# Altium PCB arduino_nano.PcbDoc
Units mil, origin at the board's own origin, x right, y up, seen from the top; angles counter-clockwise.
Board outline 730 x 1700 mil, 2 copper layers (Top Layer, Bottom Layer); 28 components, 45 nets, 157 pads, 94 vias.
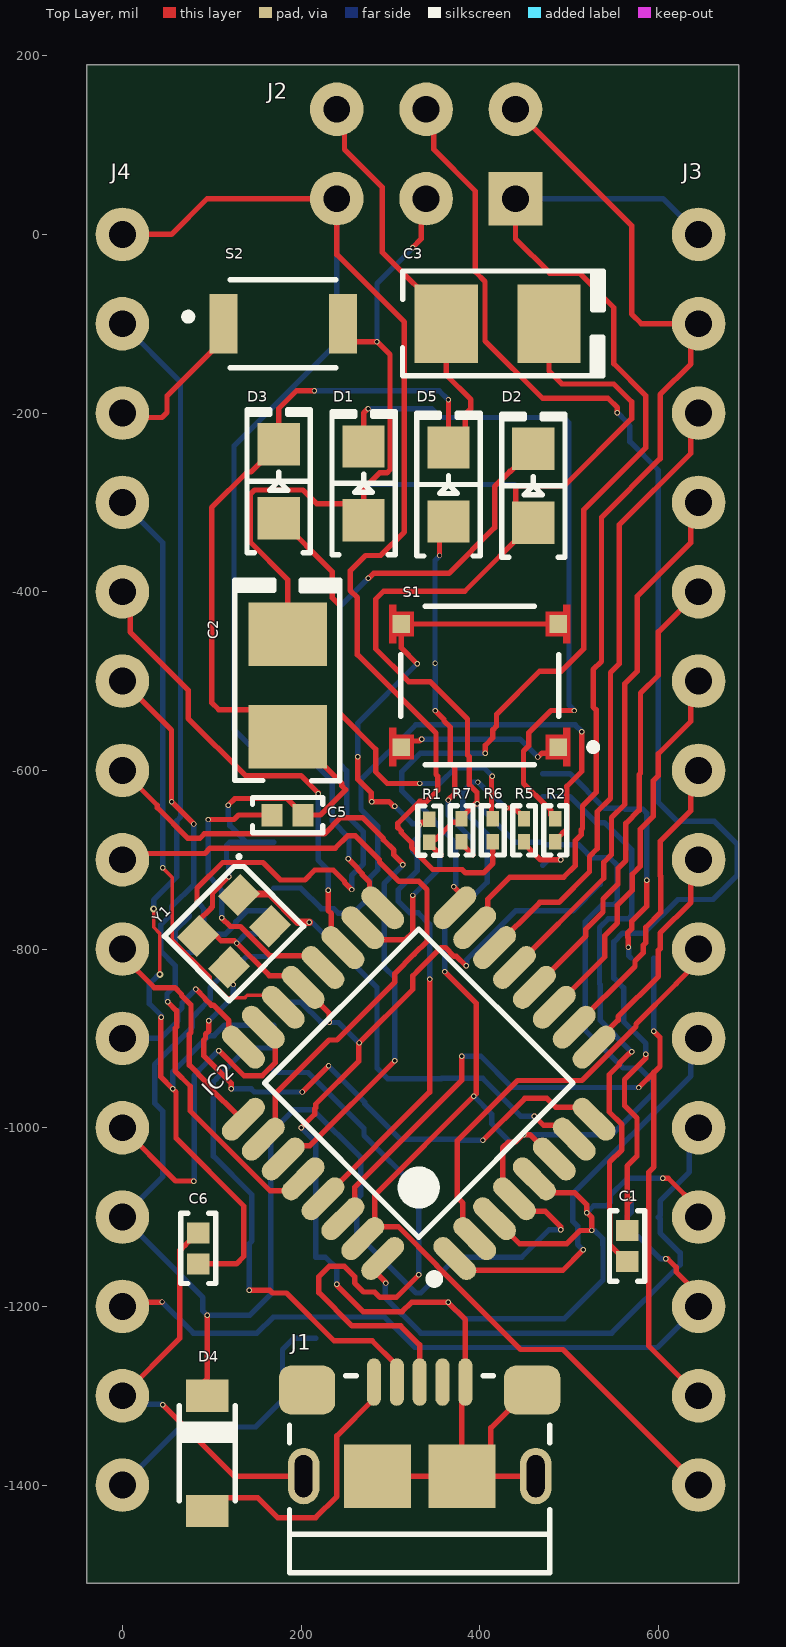
[diagram p0: Top Layer view]
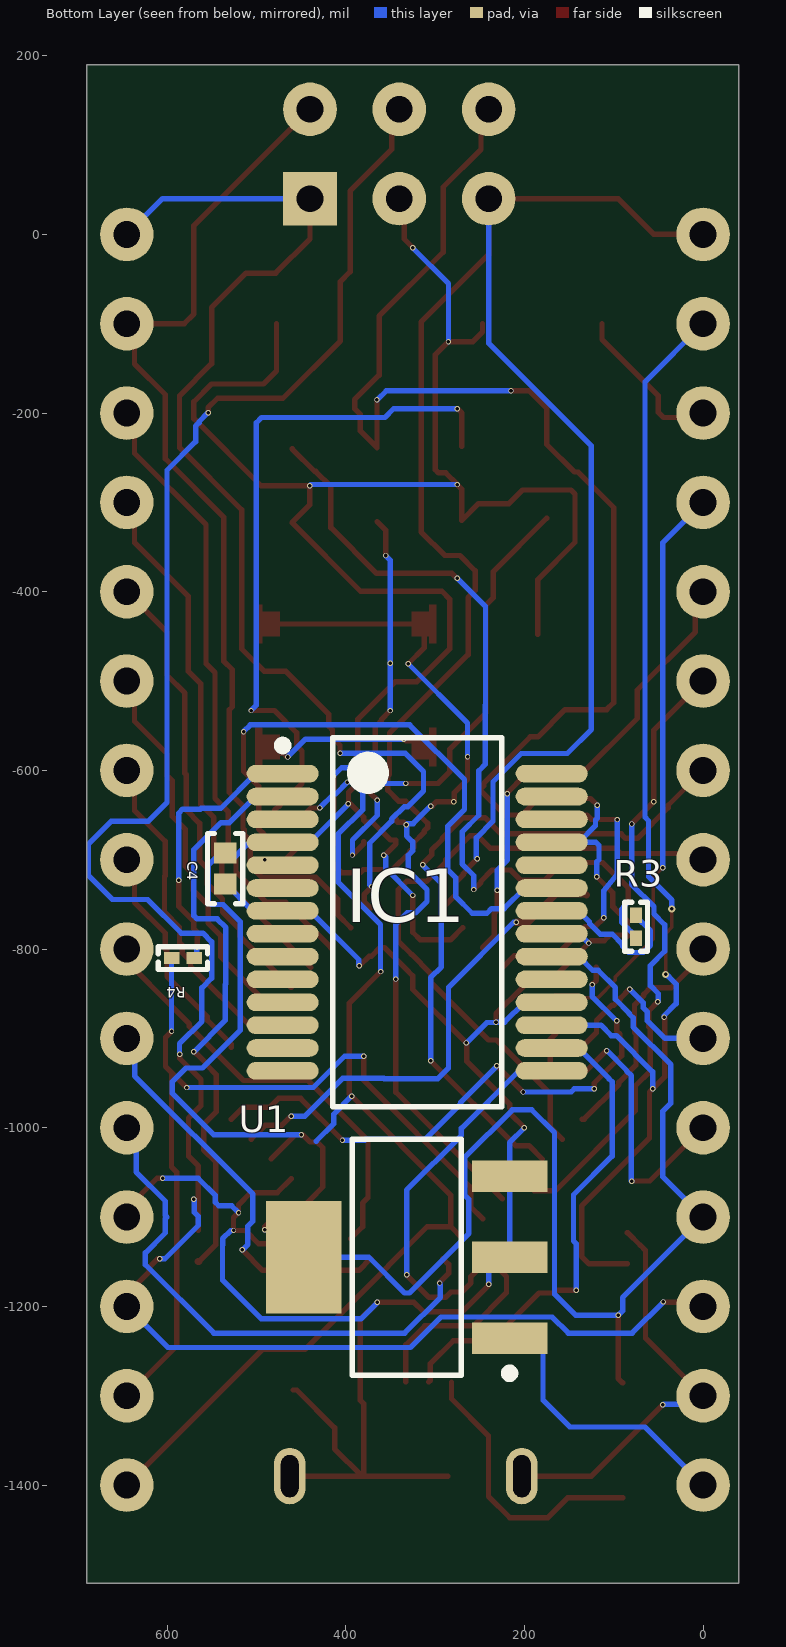
[diagram p1: Bottom Layer view, seen from below]
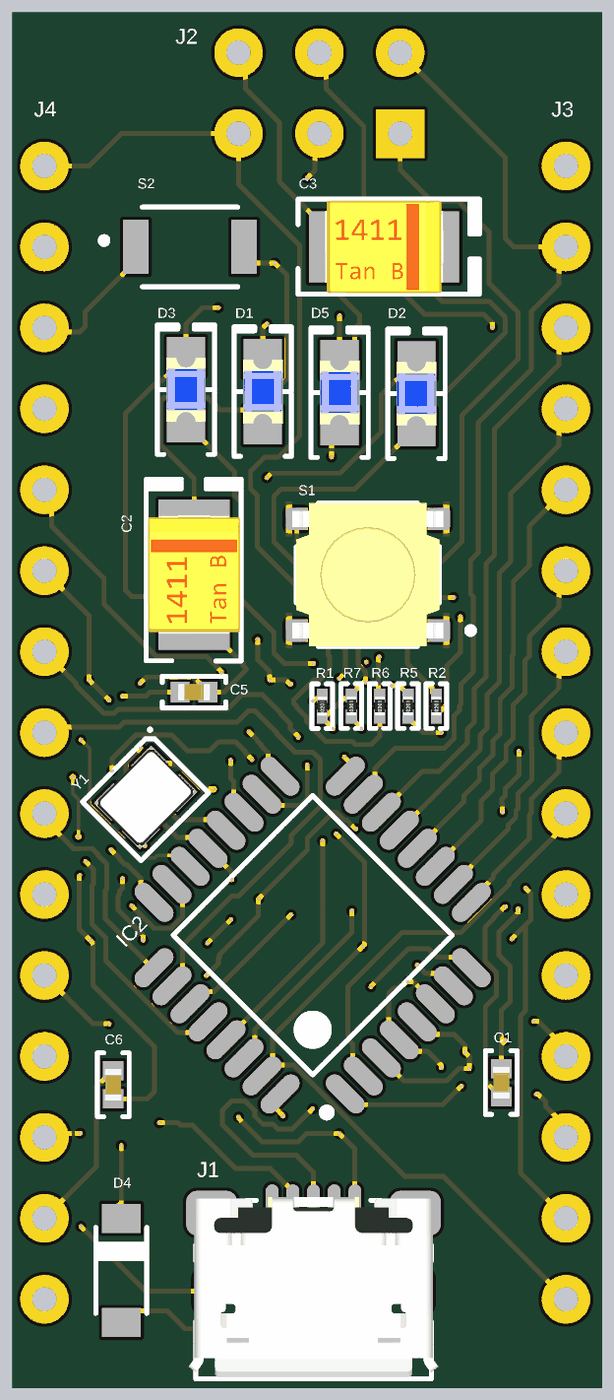
[diagram p2: 3D render of the assembled board from above, using the file's embedded part models]
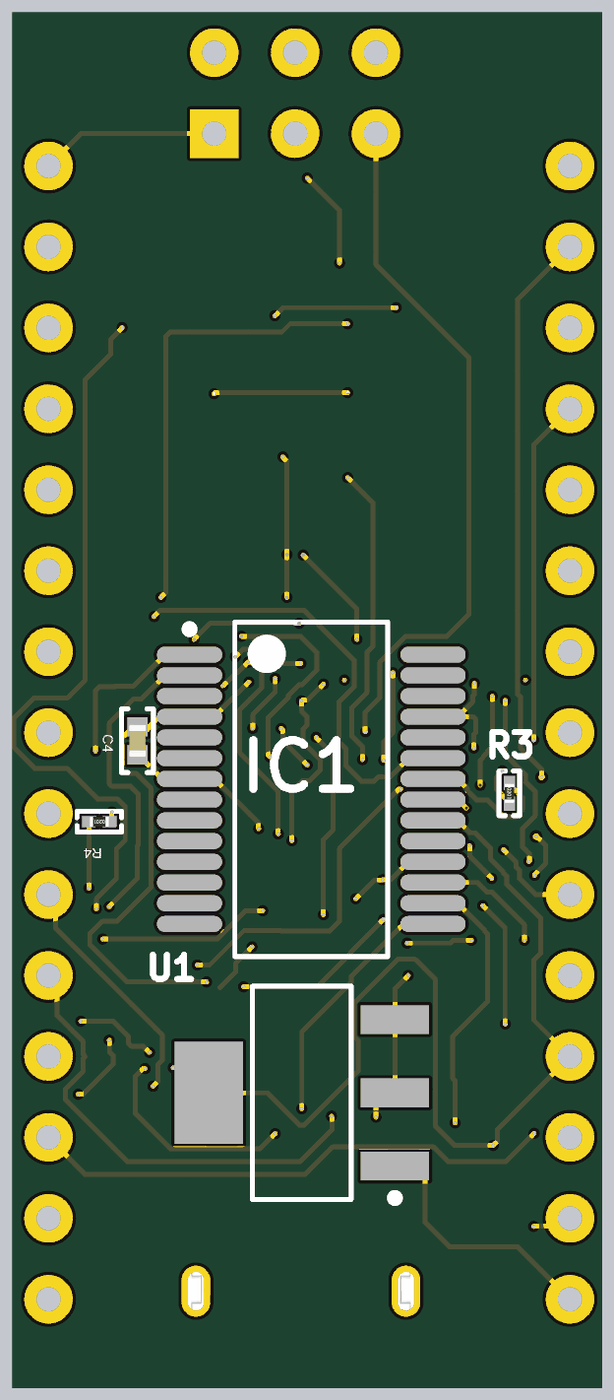
[diagram p3: 3D render of the assembled board from below, using the file's embedded part models]

## Layer stack, top to bottom
Top Solder: solder mask 0.4, Solder Resist, Dk 3.5
Top Layer: signal copper 1.4
Dielectric 1: dielectric 12.6, FR-4, Dk 4.8
Bottom Layer: signal copper 1.4
Bottom Solder: solder mask 0.4, Solder Resist, Dk 3.5

## Board outline
-40,-1510 -40,190 690,190 690,-1510

## Design rules (kind name [scope] priority, off if disabled: settings)
Clearance Clearance_1 [All] p1: gap=10 ignorepadtopadclearanceinfootprint=FALSE except(0: Arc-Hole Track-Hole SMDPad-Hole THPad-Hole Via-Hole Fill-Hole Poly-Hole Region-Hole Text-Hole; 3: Arc-SMDPad Arc-Via Track-SMDPad Track-Via SMDPad-SMDPad SMDPad-Via THPad-Via Via-Via)
Clearance [All] p2: gap=10 ignorepadtopadclearanceinfootprint=FALSE except(0: Arc-Hole Track-Hole SMDPad-Hole THPad-Hole Via-Hole Fill-Hole Poly-Hole Region-Hole Text-Hole)
DiffPairsRouting [InDifferentialPair('No Differential Pair')] p1: maxlimit=10 minlimit=0.5 mostfreqgap=0.5 toplayer_minwidth=6 toplayer_maxwidth=15 toplayer_prefwidth=6 bottomlayer_minwidth=6 bottomlayer_maxwidth=15 bottomlayer_prefwidth=6 maxuncoupledlength=500
FanoutControl Fanout_Small [(CompPinCount < 5)] p4 off: bgadir=Out bgaviamode=Centered fanoutstyle=Auto fanoutdirection=OutThenIn viagrid=1 // Fanout_Small (Default Rule)
PolygonConnect [All] p1: connectstyle=Relief reliefconductorwidth=10 reliefentries=4 polygonreliefangle="90 Angle" airgapwidth=10
RoutingVias [All] p1: holewidth=2 width=8 viastyle="Through Hole" minholewidth=3.94 minwidth=3.94 maxholewidth=7.87 maxwidth=8
SolderMaskExpansion [All] p1: expansion=4 istentingtop=FALSE
Width [All] p1: maxlimit=8 minlimit=4 preferedwidth=6 minimp=50.000000 maximp=50.000000 favimp=50.000000
28 further rules are at their usual default settings.

## Classes and differential pairs
component class arduino_nano: C1 C2 C3 C4 C5 C6 D1 D2 D3 D4 D5 IC1 IC2 J1 J2 J3 R1 R2 R3 R5 R6 R7 S1 S2 U1 Y1

## Components (designator, comment, footprint, x,y, rotation, side; value= is the part's Value field where it differs from the comment)
C1 "0.1 µF" "CAP 0402_1005" 565,-1132.32 r270 top
C2 "4.7 µF" "CAP POL 1411_3528" 185,-505 r270 top
C3 "4.7 µF" "CAP POL 1411_3528" 420,-100 r180 top
C4 "0.1µF" "CAP 0402_1005" 535,-710 r90 bottom
C5 "0.1 µF" "CAP 0402_1005" 185,-650 r0 top
C6 "0.1 µF" "CAP 0402_1005" 85,-1135 r90 top
D1 "Blue" "LED 0805_2012 BLUE" 270,-278.66 r90 top
D2 "Blue" "LED 0805_2012 BLUE" 460,-281.34 r90 top
D3 "Blue" "LED 0805_2012 BLUE" 175,-276.34 r90 top
D4 "MBR0520LT1G" SOD3716X135N 95,-1364.37 r270 top
D5 "Blue" "LED 0805_2012 BLUE" 365,-280 r90 top
IC1 "FT232RL" FT232RL 320,-770 r180 bottom
IC2 "Atmega168-20au" atmega168-20au 331.72,-950.09 r135 top
J1 "10118193-0001LF" "FCI USB 10118193-0001LF" 332.76,-1388.03 r180 top
J2 "HEAD 3X2" "Header 3x2" 440,40 r180 top
J3 "15PIN HEADER" "header 1x15" 660,-680 r0 top
J4 "15PIN HEADER" "header 1x15" 15,-680 r0 top
R1 "1 kOhms" "RES 0201_0603" 343.5,-667.4 r90 top
R2 "680 Ohms" "RES 0201_0603" 484.65,-667.17 r90 top
R3 "680 Ohms" "RES 0201_0603" 75,-775 r270 bottom
R4 "1 kOhms" "RES 0201_0603" 582.2,-810 r0 bottom
R5 "1 kOhms" "RES 0201_0603" 449.65,-667.17 r90 top
R6 "1 kOhms" "RES 0201_0603" 414.65,-667.17 r90 top
R7 "680 Ohms" "RES 0201_0603" 379.65,-667.17 r90 top
S1 "TL3315NF100Q" SW_TL3315NF100Q 400,-505 r180 top
S2 "B3U-1000P" SW_B3U-1000P 180,-100 r0 top
U1 "UA78M05" UA78M05 331.72,-1144.96 r0 bottom
Y1 "16MHz" "ABRACON ABM10" 125,-780 r225 top

## Footprints (in the part's own frame and the unit in brackets; to place one, negate y for a bottom-side part, rotate by r counter-clockwise, add the part's x,y. Pads: shape width x height; smd on the part's side, far side on the other; paste and mask are expansions set on the pad)
"ABRACON ABM10" [mm] "Crystal, 4-Leads, Body 2.00x2.45mm, Pitch 1.65mm, IPC Medium Density"
  rect 0.9x0.8 smd: 1(-0.825,-0.625) 2(0.825,-0.625) 3(0.825,0.625) 4(-0.825,0.625)
  silkscreen extent -1.65,-1.45 1.5,1.3, body extent -1.27,-1.02 1.28,1.03, height 0.5
atmega168-20au [mm] "TQFP, 32-Leads, Body 7.00x7.00mm, Pitch 0.80mm, IPC Medium Density"
  oval 1.5x0.55 smd: 1(-4.25,2.8) 2(-4.25,2) 3(-4.25,1.2) 4(-4.25,0.4) 5(-4.25,-0.4) 6(-4.25,-1.2) 7(-4.25,-2) 8(-4.25,-2.8) 17(4.25,-2.8) 18(4.25,-2) 19(4.25,-1.2) 20(4.25,-0.4) 21(4.25,0.4) 22(4.25,1.2) 23(4.25,2) 24(4.25,2.8)
  oval 0.55x1.5 smd: 9(-2.8,-4.25) 10(-2,-4.25) 11(-1.2,-4.25) 12(-0.4,-4.25) 13(0.4,-4.25) 14(1.2,-4.25) 15(2,-4.25) 16(2.8,-4.25) 25(2.8,4.25) 26(2,4.25) 27(1.2,4.25) 28(0.4,4.25) 29(-0.4,4.25) 30(-1.2,4.25) 31(-2,4.25) 32(-2.8,4.25)
  silkscreen extent -4.37,-3.1 3.1,3.75, body extent -3.5,-3.5 3.5,3.5, height 1.2
"CAP 0402_1005" [mm] "Chip Capacitor, 2-Leads, Body 1.02x0.51mm, IPC Medium Density"
  rect 0.6x0.64 smd: 1(-0.44,0) 2(0.44,0)
  silkscreen extent -1,-0.5 1,0.5, body extent -0.5,-0.26 0.5,0.26, height 0.52
"CAP POL 1411_3528" [mm] "Molded Capacitor, 2-Leads, Body 3.50x2.80mm, IPC Medium Density"
  rect 1.8x2.23 smd: 1(-1.46,0) 2(1.46,0)
  silkscreen extent -3,-1.5 2.71,1.48, body extent -1.87,-1.45 1.86,1.45, height 2
"FCI USB 10118193-0001LF" [mm] "USB 2.0 Type B Micro"
  oval 0.4x1.35 smd: 1(1.3,-2.625) 2(0.65,-2.625) 3(0,-2.625) 4(-0.65,-2.625) 5(-1.3,-2.625)
  oval 0.9x1.6 hole 0.5 slot 1.2 at 90 deg: S(-3.3,0.05) S(3.3,0.05)
  rrect50% 1.6x1.4 smd: S(-3.2,-2.4) S(3.2,-2.4)
  rect 1.9x1.8 smd: S(-1.2,0.05) S(1.2,0.05)
  silkscreen extent -3.7,-2.8 3.7,2.8, body extent -3.93,-2.9 3.93,2.76, height 2.78
FT232RL [mm] "SOP, 28-Leads, Body 10.35x5.15mm, Pitch 0.65mm, IPC Medium Density"
  oval 2.05x0.5 smd: 1(-3.825,4.225) 2(-3.825,3.575) 3(-3.825,2.925) 4(-3.825,2.275) 5(-3.825,1.625) 6(-3.825,0.975) 7(-3.825,0.325) 8(-3.825,-0.325) 9(-3.825,-0.975) 10(-3.825,-1.625) 11(-3.825,-2.275) 12(-3.825,-2.925) 13(-3.825,-3.575) 14(-3.825,-4.225) 15(3.825,-4.225) 16(3.825,-3.575) 17(3.825,-2.925) 18(3.825,-2.275) 19(3.825,-1.625) 20(3.825,-0.975) 21(3.825,-0.325) 22(3.825,0.325) 23(3.825,0.975) 24(3.825,1.625) 25(3.825,2.275) 26(3.825,2.925) 27(3.825,3.575) 28(3.825,4.225)
  silkscreen extent -3.95,-5.25 2.4,5.25, body extent -2.65,-5.25 2.65,5.25, height 2
"header 1x15" [mil] "2.54mm"
  round 60 hole 30: 1(-15,-720) 2(-15,-620) 3(-15,-520) 4(-15,-420) 5(-15,-320) 6(-15,-220) 7(-15,-120) 8(-15,-20) 9(-15,80) 10(-15,180) 11(-15,280) 12(-15,380) 13(-15,480) 14(-15,580) 15(-15,680)
"Header 3x2" [mil] "2.54mm"
  rect 60x60 hole 30: 1(0,0)
  round 60 hole 30: 2(100,0) 3(200,0) 4(0,-100) 5(100,-100) 6(200,-100)
"LED 0805_2012 BLUE" [mm] "Chip Diode, 2-Leads, Body 2.00x1.25mm, IPC Medium Density"
  rect 1.2x1.2 smd: 1(-1.05,0) 2(1.05,0)
  silkscreen extent -2.03,-0.9 2.03,0.9, body extent -1,-0.62 1,0.63, height 0.9
"RES 0201_0603" [mm] "Chip Resistor, 2-Leads, Body 0.60x0.30mm, IPC Medium Density"
  rect 0.44x0.35 smd: 1(-0.325,0) 2(0.325,0)
  silkscreen extent -0.7,-0.33 0.7,0.33, body extent -0.3,-0.15 0.3,0.15, height 0.21
SOD3716X135N [mm]
  rect 0.91x1.22 smd: A(1.635,0) C(-1.635,0)
  silkscreen extent -1.35,-0.8 1.35,0.8
SW_B3U-1000P [mm]
  rect 0.8x1.7 smd: 1(-1.7,0) 2(1.7,0)
  silkscreen extent -2.8,-1.25 1.5,1.25
SW_TL3315NF100Q [mm]
  rect 0.5x0.5 smd paste+0.1 mask+0.2: 1(-2.23,1.75) 2(2.23,1.75) 3(-2.23,-1.75) 4(2.23,-1.75)
  Top Layer region: -2.375,2.1 -1.875,2.1 -1.875,1.4 -2.375,1.4 -2.375,1.2 -2.575,1.2 -2.575,2.3 -2.375,2.3
  Top Layer region: 2.575,1.2 2.375,1.2 2.375,1.4 1.875,1.4 1.875,2.1 2.375,2.1 2.375,2.3 2.575,2.3
  Top Layer region: 2.575,-2.3 2.375,-2.3 2.375,-2.1 1.875,-2.1 1.875,-1.4 2.375,-1.4 2.375,-1.2 2.575,-1.2
  Top Layer region: -2.375,-1.4 -1.875,-1.4 -1.875,-2.1 -2.375,-2.1 -2.375,-2.3 -2.575,-2.3 -2.575,-1.2 -2.375,-1.2
  silkscreen extent -3.33,-2.25 2.25,2.25, body extent -2.37,-2.25 2.37,2.25, height 0.6
UA78M05 [mm] "SOT223, 4-Leads, Body 6.50x7.00mm (avg), Pitch 2.30mm, IPC Medium Density"
  rect 2.15x0.9 smd: 1(-2.925,2.3) 2(-2.925,0) 3(-2.925,-2.3)
  rect 2.15x3.2 smd: 4(2.925,0)
  silkscreen extent -3.05,-3.35 1.55,3.42, body extent -1.85,-3.35 1.85,3.35, height 1.7

## Part data
C1 C6: library part GCQ1555C1HR62CB01D, "CAP CER 0.62PF 50V C0G/NP0 0402", Capacitance="0.62 pF", Device Package="0402 (1005 Metric)", manufacturer="Murata Electronics", Operating Temperature="-55°C ~ 125°C", Ratings=AEC-Q200, Supplier Part Number 1=490-17557-1-ND, Temperature Coefficient="C0G, NP0", Tolerance=±0.25pF, Voltage - Rated=50V, Applications="RF, Microwave, High Frequency, Automotive", componentlink1description=Datasheet, componentlink1url=https://search.murata.co.jp/Ceramy/image/img/A01X/G101/ENG/GCQ1555C1HR62CB01-01.pdf, componentlink2description="DigiKey Link", componentlink2url=https://www.digikey.com/en/products/detail/murata-electronics/GCQ1555C1HR62CB01D/7803284, lastupdated="9/19/2022 12:57:24 PM", Lifecycle Status=Active, Minimum Order=1, Mounting Type="Surface Mount, MLCC", Package / Case="0402 (1005 Metric)", packaging=TapeAndReel, Part Number=GCQ1555C1HR62CB01D, Part Status=Active, partid=41932, price=0.04, series=GCQ, Size / Dimension="0.039\" L x 0.020\" W (1.00mm x 0.50mm)", Supplier 1=DigiKey, Thickness (Max)="0.022\" (0.55mm)"
C2 C3: library part TR3B475K025C0700, "CAP TANT 4.7UF 10% 25V 1411", Device Package="1411 (3528 Metric)", ESR (Equivalent Series Resistance)=700mOhm, manufacturer="Vishay Sprague", Manufacturer Size Code=B, Operating Temperature="-55°C ~ 125°C", Supplier Part Number 1=718-1523-1-ND, Tolerance=±10%, Voltage - Rated="25 V", Capacitance="4.7 µF", componentlink1description=Datasheet, componentlink1url=http://www.vishay.com/docs/40080/tr3.pdf, componentlink2description="DigiKey Link", componentlink2url=https://www.digikey.com/en/products/detail/vishay-sprague/TR3B475K025C0700/1859840, Features="General Purpose", Height - Seated (Max)="0.083\" (2.11mm)", lastupdated="9/1/2022 1:05:26 PM", Lifecycle Status=Active, Minimum Order=1, Mounting Type="Surface Mount", Package / Case="1411 (3528 Metric)", packaging=TapeAndReel, Part Number=TR3B475K025C0700, Part Status=Active, partid=2, price=0.46, series="TANTAMOUNT®, TR3", Size / Dimension="0.138\" L x 0.110\" W (3.50mm x 2.80mm)", Supplier 1=DigiKey, Type=Molded
C4: library part 885012205051, "CAP CER 0.015UF 25V X7R 0402", Capacitance="0.015 µF", Device Package="0402 (1005 Metric)", manufacturer="Würth Elektronik", Operating Temperature="-55°C ~ 125°C", Supplier Part Number 1=732-7546-1-ND, Temperature Coefficient=X7R, Tolerance=±10%, Voltage - Rated=25V, Applications="General Purpose", componentlink1description=Datasheet, componentlink1url=https://katalog.we-online.de/pbs/datasheet/885012205051.pdf, componentlink2description="DigiKey Link", componentlink2url=https://www.digikey.com/en/products/detail/würth-elektronik/885012205051/5453401, lastupdated="9/19/2022 12:57:34 PM", Lifecycle Status=Active, Minimum Order=1, Mounting Type="Surface Mount, MLCC", Package / Case="0402 (1005 Metric)", packaging=TapeAndReel, Part Number=885012205051, Part Status=Active, partid=2017, price=0.02, series=WCAP-CSGP, Size / Dimension="0.039\" L x 0.020\" W (1.00mm x 0.50mm)", Supplier 1=DigiKey, Thickness (Max)="0.022\" (0.55mm)"
C5: library part C0402C151F5GAC7867, "CAP CER 150PF 50V NP0 0402", Capacitance="150 pF", Device Package="0402 (1005 Metric)", manufacturer=KEMET, Operating Temperature="-55°C ~ 125°C", Supplier Part Number 1=399-14269-1-ND, Temperature Coefficient="C0G, NP0", Tolerance=±1%, Voltage - Rated=50V, Applications="General Purpose", componentlink1description=Datasheet, componentlink1url=https://api.kemet.com/component-edge/download/datasheet/C0402C151F5GAC7867.pdf, componentlink2description="DigiKey Link", componentlink2url=https://www.digikey.com/en/products/detail/kemet/C0402C151F5GAC7867/2196312, Features="Low ESL", lastupdated="9/19/2022 12:57:36 PM", Lifecycle Status=Active, Minimum Order=1, Mounting Type="Surface Mount, MLCC", Package / Case="0402 (1005 Metric)", packaging=TapeAndReel, Part Number=C0402C151F5GAC7867, Part Status=Active, partid=1709, price=0.43, series="SMD Comm C0G", Size / Dimension="0.039\" L x 0.020\" W (1.00mm x 0.50mm)", Supplier 1=DigiKey, Thickness (Max)="0.022\" (0.55mm)"
D1 D2 D3 D5: library part 5975606507F, "LED BLUE 0805 SMD", Current - Test=5mA, Device Package="0805 (2012 Metric)", Lens Color=0.93mm, manufacturer=Dialight, Millicandela Rating=36mcd, Supplier Device Package=0805, Supplier Part Number 1=350-4390-1-ND, Voltage - Forward (Vf) (Typ)=2.9V, Color=Blue, componentlink1description=Datasheet, componentlink1url=http://www.dialightsignalsandcomponents.com/Assets/Drawings/2D_Drawings_DrawingDetailedSpec/NewDrawings/18370A.pdf, componentlink2description="DigiKey Link", componentlink2url=https://www.digikey.com/en/products/detail/dialight/5975606507F/9385445, Configuration=Standard, Height (Max)=0.93mm, lastupdated="9/1/2022 1:14:53 PM", Lens Size="1.40mm x 1.24mm", Lens Style="Rectangle with Flat Top", Lifecycle Status=Active, Minimum Order=1, Mounting Type="Surface Mount", Package / Case="0805 (2012 Metric)", packaging=TapeAndReel, Part Number=5975606507F, Part Status=Active, partid=753, price=0.14, series=597, Size / Dimension="2.00mm L x 1.25mm W", Supplier 1=DigiKey, Wavelength - Dominant=470nm
D4: "Rectifier, Schottky Power; Plastic Sod-123; 0.5 a @ +90c If; +125; 20v; 1000", Package=None, Availability=Unavailable, MP=MBR0520LT1G, price=None
J1: "CONN RCPT USB2.0 MICRO B SMD R/A", Current Rating (Amps)="1.8A per Contact", manufacturer="Amphenol ICC (FCI)", Operating Temperature="-30°C ~ 80°C", Supplier Part Number 1=609-4616-2-ND, Voltage - Rated=100VAC, componentlink1description=Datasheet, componentlink1url=https://cdn.amphenol-icc.com/media/wysiwyg/files/documentation/datasheet/inputoutput/io_usb_micro.pdf, componentlink2description="DigiKey Link", componentlink2url=//digikey.com/product-detail/en/amphenol-icc-fci/10118193-0001LF/609-4616-2-ND/2785388, Connector Type="USB - micro B", Features="Solder Retention", Gender=Receptacle, lastupdated="12/9/2019 8:51:28 PM", Lifecycle Status=0, Mating Cycles=10000, Minimum Order=1, Mounting Feature=Horizontal, Mounting Type="Surface Mount, Right Angle; Through Hole", Number of Contacts=5, Number of Ports=1, packaging=TapeAndReel, Part Number=10118193-0001LF, Part Status=Active, price=0.21, series=-, Shielding=Shielded, Specifications="USB 2.0", Supplier 1=DigiKey, Termination=Solder
R1 R2 R3 R4 R5 R6 R7: library part 7-2176074-4, "RES SMD 33.2KOHM 0.5% 1/32W 0201", Device Package="0201 (0603 Metric)", manufacturer="TE Connectivity Passive Product", Operating Temperature="-55°C ~ 155°C", Power (Watts)="0.03W, 1/32W", Resistance="33.2 kOhms", Supplier Device Package=0201, Supplier Part Number 1=A129571CT-ND, Temperature Coefficient=±50ppm/°C, Tolerance=±0.5%, componentlink1description=Datasheet, componentlink1url=https://www.te.com/commerce/DocumentDelivery/DDEController?Action=srchrtrv&DocNm=1773200&DocType=DS&DocLang=English, componentlink2description="DigiKey Link", componentlink2url=https://www.digikey.com/en/products/detail/te-connectivity-passive-product/7-2176074-4/4489517, Composition="Thin Film", Height - Seated (Max)="0.011\" (0.28mm)", lastupdated="9/19/2022 1:09:18 PM", Lifecycle Status=Active, Minimum Order=1, Number of Terminations=2, Package / Case="0201 (0603 Metric)", packaging=TapeAndReel, Part Number=7-2176074-4, Part Status=Active, partid=1, price=0.10, series="CPF, Neohm", Size / Dimension="0.023\" L x 0.011\" W (0.58mm x 0.29mm)", Supplier 1=DigiKey
S1: "Tactile Switch SPST-NO Top Actuated Surface Mount", Package=None, Availability="In Stock", Check_prices=https://www.snapeda.com/parts/TL3315NF100Q/E-Switch/view-part/289310/?ref=eda, MF=E-Switch, MP=TL3315NF100Q, price=None, Purchase-URL=https://pricing.snapeda.com/search/part/TL3315NF100Q/?ref=eda, SnapEDA_Link=https://www.snapeda.com/parts/TL3315NF100Q/E-Switch/view-part/289310/?ref=snap
S2: "Switch Tactile N.O. SPST Round Button Gull Wing 0.05A 12VDC 1.5N SMD Embossed T/R", Package=None, Availability=Unavailable, MP=B3U-1000P, price=None
Y1: library part ABM10-16.000MHZ-E20-T, "CRYSTAL 16.0000MHZ 10PF SMD", Device Package="4-SMD, No Lead", ESR (Equivalent Series Resistance)="150 Ohms", Frequency Stability=±20ppm, Load Capacitance=10pF, manufacturer="Abracon LLC", Operating Mode=Fundamental, Operating Temperature="-20°C ~ 70°C", Supplier Part Number 1=535-9810-1-ND, componentlink1description=Datasheet, componentlink1url=https://abracon.com/Resonators/ABM10.pdf, componentlink2description="DigiKey Link", componentlink2url=http://digikey.com/product-detail/en/abracon-llc/ABM10-16.000MHZ-E20-T/535-9810-1-ND/2001433, Frequency=16MHz, Frequency Tolerance=±20ppm, Height - Seated (Max)="0.028\" (0.70mm)", lastupdated="3/19/2020 10:27:46 PM", Lifecycle Status=Active, Minimum Order=1, Mounting Type="Surface Mount", Package / Case="4-SMD, No Lead", packaging=TapeAndReel, Part Number=ABM10-16.000MHZ-E20-T, Part Status=Active, partid=278, price=0.96, series=ABM10, Size / Dimension="0.098\" L x 0.079\" W (2.50mm x 2.00mm)", Supplier 1=DigiKey, Type="MHz Crystal"

## Via types
v1: diameter 6, hole 3.94, Top Layer to Bottom Layer, 92 vias
v2: diameter 8, hole 3.94, Top Layer to Bottom Layer, 2 vias

## Nets (pads, with @x,y where several pads share a name; then routed paths per layer and width w, separated by ;. In a path a pad name is that pad's centre, name@x,y a point inside that pad or via, vN(x,y) a via of type N, cw(c..) or ccw(c..) an arc to the next point about the centre after c; other vN are vias at no path point)
3V3: C6.1 IC1.17 J4.14 | length 1344.4
  Top Layer w4: v2(35,-755) 35,-775.6 41.97,-782.57 41.97,-798.43 ; v2(41.97,-828.33) 41.97,-801.57 ; 42,-801.54 42,-800 42,-798.46
  Top Layer w6: v1(43.67,-876.33) 43,-877 43,-943.16 v1(56.38,-956.54) 60,-960.16 60,-1011.72 135.86,-1087.57 135.86,-1144.14 127.68,-1152.32 C6.1
  Bottom Layer w6: J4.14 65,-165 65,-652.37 61,-656.37 61,-719 35,-745 v2(35,-755) ; v2(41.97,-828.33) 41.43,-828.33 39.14,-830.61 38.56,-830.61 30.09,-839.08 30.09,-861.1 43.67,-874.67 v1(43.67,-876.33) ; v1(56.38,-956.54) 56.38,-937.39 96.91,-896.86 102.75,-896.86 114.45,-885.16 IC1.17
+5: C2.1 C3.1 C4.2 D1.1 D2.1 D4.C IC1.4 IC1.20 IC2.4 IC2.6 IC2.18 J2.2 J4.4 R1.1 R7.2 S2.2 U1.4 | length 4351.4
  Top Layer w6: D4.C@90,-1285.63 95,-1280.63 v1(95,-1210) ; C2.1 185,-386.24 143.38,-344.61 143.38,-290.74 148.06,-286.06 201.94,-286.06 217.26,-301.38 251.38,-301.38 D1.1 270,-285.49 275,-280.49 v1(275,-280) 288.06,-266.94 296.11,-266.94 299.62,-263.43 299.62,-134.62 v1(285,-120) 257.68,-120 246.93,-109.25 S2.2 ; IC2.18 282.67,-789.68 316.49,-789.68 325,-781.17 v1(325,-740) ; v1(325,-15) 325,-14.51 334.51,-5 334.51,34.51 J2.2 ; v1(357.28,-694.96) 356.9,-694.58 356.11,-694.58 343.86,-682.32 343.86,-677.92 349.9,-677.92 369.78,-658.03 377.76,-658.03 379.65,-656.14 379.65,-652.6 394.76,-637.49 v1(397.13,-637.49) 396.88,-637.24 396.88,-624.58 388.09,-615.8 388.09,-584.7 386.33,-582.94 386.33,-542.56 381.18,-537.41 381.18,-537.34 344.5,-500.65 320.31,-500.65 283.62,-463.97 283.62,-408.24 292.41,-399.45 383.23,-399.45 D2.1 440.32,-302.99 v1(440.32,-281.34) 494.89,-281.34 570,-206.23 570,-187.37 550.06,-167.43 492.01,-167.43 477.48,-152.9 C3.1 ; v1(449.53,-1008) 447.95,-1008 440.06,-1015.9 432.1,-1015.9 425.68,-1022.32 425.68,-1066.32 IC2.4 453.02,-1093.66 473.52,-1093.66 490.75,-1110.88 v1(490.75,-1114) ; v1@449.53,-1007.76 456.2,-1007.76 IC2.6
  Bottom Layer w6: IC1.20 138.9,-808.39 123.57,-823.72 117.51,-823.72 98.2,-843.02 98.2,-856.15 82.79,-871.56 82.79,-872.42 78.31,-876.9 78.31,-887.17 36.04,-929.45 36.04,-972.4 45,-981.36 45,-1055 J4.4 90,-1190 90,-1205 v1(95,-1210) 142.44,-1210 166.24,-1186.2 166.24,-1005.54 191.78,-980 213.51,-980 266.89,-1033.38 266.89,-1075.44 262.2,-1080.13 262.2,-1118.38 328.82,-1185 334,-1185 374.03,-1144.96 U1.4 477.85,-1114 v1(490.75,-1114) ; v1(275,-280) 438.98,-280 v1(440.32,-281.34) ; v1(285,-120) 285,-55 v1(325,-15) ; v1(325,-740) 355.09,-709.91 355.09,-697.15 v1(357.28,-694.96) ; v1(397.13,-637.49) 440.08,-680.43 IC1.4 473.21,-683.05 510.68,-683.05 521,-693.37 521,-694.16 524.51,-697.68 545,-697.68 554,-706.68 554,-746.62 550.49,-750.13 537.24,-750.13 518.12,-769.25 518.12,-890.93 560.35,-933.16 578.79,-933.16 594,-948.37 594,-961.63 547.63,-1008 v1(449.53,-1008)
A0: IC2.23 J4.5 | length 388.9
  Top Layer w6: J4.5 59.65,-1059.65 79.65,-1059.65 v1(80,-1060) ; v1(108.02,-913.7) 136.1,-941.78 156.48,-941.78 170.95,-927.3 170.95,-900.68 IC2.23
  Bottom Layer w6: v1(80,-1060) 80.35,-1059.65 80.35,-941.71 85.68,-936.37 85.68,-935.68 107.66,-913.7 v1(108.02,-913.7)
A1: IC2.24 J4.6 | length 202.6
  Top Layer w6: v1(82.2,-844.76) 92.53,-855.08 92.53,-855.65 99.63,-862.75 101.91,-862.75 119.24,-880.08 119.24,-893.51 IC2.24
  Bottom Layer w6: J4.6 42.63,-900 62.31,-880.31 62.31,-870.27 66.79,-865.79 66.79,-860.17 v1(82.2,-844.76)
A2: IC2.25 J4.7 | length 263.1
  Top Layer w6: J4.7 0,-807.57 35.76,-843.33 44,-843.33 44.16,-843.16 58.79,-843.16 66.2,-850.57 66.2,-851.95 76.78,-862.53 76.78,-893.45 75,-895.23 75,-929.9 94.31,-949.22 94.31,-951.58 133.19,-990.46 IC2.25
A3: IC2.26 J4.8 | length 738.9
  Top Layer w6: J4.8 7,-693 92.25,-693 98.23,-687.02 238.28,-687.02 252.34,-672.96 260.63,-672.96 287.86,-700.19 287.86,-702.33 309.67,-724.14 318.24,-724.14 318.37,-724 331.63,-724 341,-733.37 341,-791.31 326.63,-805.68 ; IC2.26 170.95,-999.51 170.95,-962.27 231.44,-901.78 240.06,-901.78 305,-836.84 305,-827.28 326.6,-805.68
A4: IC2.27 J4.9 | length 786.5
  Top Layer w6: J4.9 39,-639 39,-641.63 73.37,-676 86.63,-676 91.63,-671 226.02,-671 244.21,-652.81 268.76,-652.81 292.19,-676.24 292.19,-677.6 303.86,-689.27 303.86,-694.48 313.95,-704.58 v1(313.95,-705.79) ; IC2.27 195,-1020 210,-1020 v1(305,-925)
  Bottom Layer w6: v1(305,-925) 305,-831.87 293,-819.87 293,-726.75 v1(313.95,-705.79)
A5: IC2.28 J4.10 | length 721
  Top Layer w6: J4.10 55,-555 v1(55,-635) v1(80,-660) ; v1(50.79,-859.16) 60.78,-869.15 60.78,-886.82 59,-888.6 59,-936.53 76,-953.53 76,-981.24 165.25,-1070.5 189.05,-1070.5 IC2.28
  Bottom Layer w6: v1(50.79,-859.16) 50,-858.37 50,-850 59,-841 59,-818.46 43,-802.46 43,-772.77 54.97,-760.8 54.97,-752.51 80,-727.49 v1(80,-660)
A6: IC2.19 J4.11 | length 537
  Top Layer w6: J4.11 8.64,-408.64 8.64,-445 73.68,-510.04 73.68,-541.8 137.79,-605.91 199.97,-605.91 219.07,-625.02 v1(219.07,-626.03) ; v1(230.4,-734.17) 230.4,-756.73 233.84,-760.17 233.84,-785.4 IC2.19
  Bottom Layer w6: v1(219.07,-626.03) 219.07,-700.35 230.4,-711.68 v1(230.4,-734.17)
A7: IC2.22 J4.12 | length 672.5
  Top Layer w4: v1(45,-709) 55.97,-719.97 55.97,-789.03 98.16,-831.22 98.16,-834.96 117.92,-854.72 136.76,-854.72 139.78,-851.69 166.51,-851.69 IC2.22
  Bottom Layer w6: J4.12 45,-345 v1(45,-709)
AREF: J4.13 S2.1 | length 179.8
  Top Layer w6: J4.13 5,-205 44.14,-205 50,-199.14 50,-180.79 113.07,-117.72 S2.1
D0/RX: IC2.30 J3.2 R4.2 | length 994.8
  Top Layer w6: IC2.30 260.04,-1088.59 260.04,-1066.67 380,-946.71 v1(380,-920) ; v1(578,-955) 595,-938 ; v1(595,-892.12) 601.78,-898.9 601.78,-931.22 595,-938 ; J3.2 589.04,-1244.04 589.04,-1049.89 595,-1043.93 595,-938
  Bottom Layer w6: v1(380,-920) 401.34,-920 436.34,-955 v1(578,-955) ; v1(595,-892.12) R4.2
D1/TX: IC2.31 J3.1 R5.2 | length 1239
  Top Layer w6: IC2.31 IC2.31@282.31,-1110.86 ; v1(360.81,-825.13) 396,-860.32 396,-961.98 282.31,-1075.67 IC2.31@282.31,-1110.86 ; v1(429.13,-642.05) 439.09,-642.05 449.65,-652.6 R5.2 ; J3.1 493.16,-1248.16 445.61,-1248.16 352.09,-1154.64 352.09,-1154.02 308.93,-1110.86 IC2.31@282.31,-1110.86
  Bottom Layer w6: v1(360.81,-825.13) 361,-824.94 361,-772.48 408.44,-725.04 408.44,-671.43 381.13,-644.12 381.13,-624.27 392.39,-613 v1(398.03,-613) ; v1(393.32,-964.65) 413.31,-984.65 413.31,-995.39 432.96,-1015.04 ; v1(398.03,-613) 411.11,-626.11 413.19,-626.11 v1(429.13,-642.05)
D2: IC2.32 J3.5 | length 611.5
  Top Layer w6: IC2.32 284.84,-1152.88 284.84,-1163.1 295,-1173.26 v1(295,-1173.81)
  Bottom Layer w6: v1(295,-1173.81) 294.62,-1174.19 294.62,-1175.38 294.09,-1175.91 294.09,-1190 334.05,-1229.96 547.67,-1229.96 624.28,-1153.35 624.28,-1140.09 602,-1117.81 602,-1102 600,-1100 602,-1098 602,-1082.19 634.63,-1049.56 634.63,-1024.98 645,-1014.61 J3.5
D3: IC2.1 J3.6 | length 458.6
  Top Layer w6: IC2.1 385.31,-1159.58 492.95,-1159.58 v1(515.76,-1136.77)
  Bottom Layer w6: v1(515.76,-1136.77) 509.58,-1130.58 509.58,-1110.2 504,-1104.63 504,-1074.25 636.25,-942 636.25,-908.75 J3.6
D4: IC2.2 J3.7 | length 486.2
  Top Layer w6: IC2.2 381.14,-1110.86 381.14,-1084.42 375,-1078.29 375,-1014.35 442.26,-947.09 514.42,-947.09 575,-886.51 575,-883.84 620,-838.84 620,-838.53 645,-813.53 J3.7
D5: IC2.9 J3.8 | length 258.2
  Top Layer w6: IC2.9 527.99,-906.57 555,-879.56 555,-875.55 600,-830.55 600,-801.48 602,-799.48 602,-782.19 636.36,-747.83 636.36,-708.64 J3.8
D6: IC2.10 J3.9 | length 345.8
  Top Layer w6: IC2.10 573.76,-819.4 573.76,-813.5 583,-804.26 583,-795.85 586,-792.85 586,-775.56 602.83,-758.74 602.83,-718.64 602,-717.81 602,-679.36 636.36,-645 636.36,-608.64 J3.9
D7: IC2.11 J3.10 | length 432.1
  Top Layer w6: IC2.11 540,-808.62 540,-784.79 554,-770.79 554,-750.8 570.83,-733.97 570.83,-716.26 579.54,-707.55 579.54,-665.97 594.38,-651.13 594.38,-611.45 600,-605.82 600,-581.36 636.36,-545 636.36,-508.64 J3.10
D8: IC2.12 J3.11 | length 519.1
  Top Layer w6: IC2.12 518.87,-785.22 518.87,-777.64 538,-758.51 538,-744.17 554.83,-727.35 554.83,-709.63 563.54,-700.92 563.54,-659.35 578.38,-644.5 578.38,-604.82 580,-603.2 580,-513.48 600,-493.48 600,-445 J3.11
D9: IC2.13 J3.12 | length 606
  Top Layer w6: IC2.13 538.83,-720.72 538.83,-703 547.54,-694.29 547.54,-652.72 562.38,-637.88 562.38,-502.82 576.38,-488.82 576.38,-404.98 636.36,-345 636.36,-308.64 J3.12
D10: IC2.14 J3.13 | length 705.4
  Top Layer w6: IC2.14 467.26,-747.74 488.52,-747.74 522.83,-713.44 522.83,-696.38 531.54,-687.67 531.54,-646.09 546.38,-631.25 546.38,-490.54 556.38,-480.54 556.38,-324.98 636.36,-245 636.36,-208.64 J3.13
D11/MOSI: IC2.15 J2.4 J3.14 | length 1180.6
  Top Layer w6: IC2.15 408.79,-761.67 408.79,-744.43 433.65,-719.57 494.07,-719.57 506.83,-706.81 506.83,-678.85 513.54,-672.14 513.54,-666.46 515,-665 515,-640 530.38,-624.62 530.38,-532.27 527.01,-528.9 527.01,-487.28 536.38,-477.91 536.38,-316.7 602,-251.08 602,-179.36 636.36,-145 636.36,-108.64 J3.14 580.86,-100 570,-89.14 570,10 J2.4
D12/MISO: IC2.16 J2.1 J3.15 | length 1300.3
  Top Layer w6: v1(371.09,-730) 371.09,-730.49 379.45,-738.85 379.45,-746.46 IC2.16 ; v1(406.33,-581) 406.33,-571.82 414.76,-563.4 414.76,-554.57 418.82,-550.5 418.82,-537.34 467.22,-488.94 491.41,-488.94 516.38,-463.97 516.38,-308.41 586,-238.79 586,-180.75 550,-144.75 550,-81.88 511.56,-43.44 478.44,-43.44 440,-5 J2.1
  Bottom Layer w6: v1(371.09,-730) 373.28,-727.81 373.28,-681.53 348.6,-656.84 348.6,-654.55 334.81,-640.76 330.75,-640.76 312.88,-622.89 312.88,-601.26 333.14,-581 v1(406.33,-581) ; J2.1 605,40 J3.15
D13/SCK: IC2.17 J2.3 J4.15 R6.1 | length 2192.2
  Top Layer w6: J4.15 55,0 95,40 J2.3 240,-22.64 315.62,-98.27 315.62,-332.94 289.11,-359.45 272.27,-359.45 255,-376.72 255,-398.59 263.02,-406.61 263.02,-470.39 351,-558.37 351,-604.44 352.88,-606.32 352.88,-622.25 340.53,-634.61 332.9,-634.61 308.35,-659.15 308.35,-664.12 312.19,-667.96 312.19,-669.32 323.86,-680.99 323.86,-686.2 328.61,-690.96 328.61,-692.17 347.4,-710.96 380.34,-710.96 384.1,-714.72 404.17,-714.72 414.76,-704.14 414.76,-683.62 414.65,-683.51 R6.1 ; v1(252.88,-698.98) 263.24,-709.35 263.24,-709.84 263.86,-710.45 263.86,-711.05 268.61,-715.81 268.61,-717.02 276.65,-725.06 276.65,-739.12 IC2.17
  Bottom Layer w6: J2.3 240,-121.72 125,-236.72 125,-554.14 152.01,-581.15 203.49,-581.15 235.07,-612.73 235.07,-656.83 253.74,-675.5 253.74,-698.12 v1(252.88,-698.98)
GND: C2.2 C3.2 C4.1 C5.2 C6.2 D3.2 D5.2 IC1.7 IC1.18 IC1.21 IC1.25 IC2.3 IC2.5 IC2.21 J1.5 J1.S J2.6 J3.4 J4.2 U1.2 U1.3 Y1.2 | length 4458.1
  Top Layer w6: J4.2 64.4,-1235.6 64.4,-1137.2 70.04,-1131.56 70.33,-1131.56 84.21,-1117.68 C6.2 ; v1(45,-1310) 125,-1390 202.83,-1390 J1.S@201.29,-1388.46 ; v1(118.37,-639) 125.97,-631.4 184.51,-631.4 202.32,-649.21 C5.2 221.57,-650 249.84,-621.72 245.62,-617.5 245.62,-614.64 193.46,-562.48 C2.2 154.57,-532.05 107.9,-532.05 100,-524.14 100,-305.84 139.78,-266.06 143.94,-266.06 D3.2 175,-195 195,-175 v1(215,-175) ; v1(119.01,-719.02) 100.9,-737.13 100.9,-752.54 99.58,-753.87 84.63,-768.82 Y1.2 86.03,-784.18 104.05,-784.18 110.58,-790.7 125.47,-790.7 164.45,-829.69 189.05,-829.69 IC2.21 231.72,-872.37 231.72,-881.72 v1(231.78,-881.78) ; v1(200.06,-1000) 215.33,-984.73 215.33,-978.63 216.46,-977.51 216.46,-973.67 264.65,-925.47 264.65,-905.47 v1(265,-905.13) 325,-845.13 325,-829.91 333.23,-821.68 356.63,-798.31 361.6,-798.31 371.43,-808.15 373.96,-808.15 384.51,-818.69 v1(385,-818.69) ; v1(240,-1175) 240.35,-1175.35 240.35,-1176.7 269.45,-1205.81 313.19,-1205.81 323.58,-1195.42 v1(364.58,-1195.42) 383.94,-1214.77 J1.5 383.94,-1304.94 380,-1308.88 J1.S@380,-1390 ; J2.6 248.64,131.36 248.64,95 290.83,52.81 290.83,-19.84 362.52,-91.54 C3.2 362.52,-157.52 390,-185 390,-195 383.62,-201.38 383.62,-220.04 D5.2 v1(365,-185) ; J1.S@285.51,-1390 J1.S@380,-1390 ; IC2.3 444.82,-1130 497.37,-1130 512.37,-1115 v1(525.58,-1115) 525.58,-1100.58 v1(520,-1095) 520,-1086.4 506.33,-1072.73 476.63,-1072.73 IC2.5 ; J1.S@458.74,-1293.54 454.8,-1293.54 412.4,-1335.95 412.4,-1359.57 J1.S@381.97,-1390 ; J1.S@462.68,-1390 J1.S@381.97,-1390 ; v1(605.04,-1056.52) 611.03,-1056.52 645,-1090.49 J3.4 ; J1.S@380,-1390 J1.S@381.97,-1390
  Bottom Layer w6: J4.2 9.57,-1309.57 44.08,-1309.57 44.51,-1310 v1(45,-1310) ; v1(118.37,-639) 118.37,-653.37 120.38,-655.38 120.38,-661.92 IC1.25@138.9,-680.43 ; v1(119.01,-719.02) 119.01,-702.45 116.54,-699.98 116.54,-683.95 120.06,-680.43 IC1.25@138.9,-680.43 ; v1(128.05,-793.28) 138.53,-782.8 IC1.21 ; IC1.18 199.92,-859.57 222.13,-881.78 v1(231.78,-881.78) 232.12,-882.12 242,-882.12 v1(265,-905.13) ; IC1.25 IC1.25@138.9,-680.43 ; v1(200.06,-1000) 216.56,-1016.5 U1.3 U1.2 227.28,-1144.96 240,-1157.68 v1(240,-1175) ; v1(215,-175) 354.51,-175 364.51,-185 v1(365,-185) ; v1(364.58,-1195.42) 383.12,-1213.96 494.52,-1213.96 537.93,-1170.54 537.93,-1131.23 537.72,-1131.02 537.72,-1124.07 528.66,-1115 v1(525.58,-1115) ; v1(385,-818.69) 385,-818.2 385.34,-817.86 385.34,-811.94 440.08,-757.2 IC1.7 504.33,-757.2 534.21,-727.32 C4.1 ; v1(520,-1095) 527.65,-1087.35 542.16,-1087.35 545.98,-1083.53 545.98,-1075.74 565.19,-1056.52 v1(605.04,-1056.52)
NetC1_2: C1.2 IC1.2 | length 658.8
  Top Layer w6: 545.31,-1094.92 545.31,-1038.53 559.04,-1024.81 559.04,-996.3 545,-982.26 545,-940.55 556.03,-929.52 556.03,-928.1 567.07,-917.07 567.39,-917.07 569.46,-915 v1(570,-915) ; 545.4,-1095.01 545.4,-1130.83 C1.2@564.21,-1149.65
  Top Layer w8: C1.2@564.21,-1149.65 C1.2
  Bottom Layer w6: IC1.2 501.1,-629.25 530.3,-658.45 539.69,-658.45 570,-688.76 570,-762.62 566.49,-766.13 543.87,-766.13 534.12,-775.88 534.12,-839.12 535,-840 535,-880 v1(570,-915)
NetC5_1: C5.1 IC2.20 | length 325.3
  Top Layer w6: v1(96.2,-655) 125,-655 130,-650 C5.1 ; v1(111.08,-764.99) 120.79,-774.7 132.1,-774.7 164.81,-807.42 211.32,-807.42 IC2.20
  Bottom Layer w6: v1(96.2,-655) 96,-655.2 96,-713.93 ccw(c102,-713.93) 97.32,-717.69 ; 97.34,-717.71 111.08,-734.65 111.08,-736.78 v1(111.08,-764.99)
NetD1_2: D1.2 R2.2 | length 769.5
  Top Layer w6: D1.2 270,-200 v1(275,-195) ; R2.2@479.54,-650 479.54,-644.54 475,-640 474.54,-640 449,-614.46 449,-578.37 454.82,-572.55 454.82,-557.9 479.72,-533 v1(506,-533)
  Bottom Layer w6: v1(275,-195) 346.23,-195 356.23,-205 494.14,-205 500,-210.86 500,-527 v1(506,-533)
NetD2_2: D2.2 R3.2 | length 922.2
  Top Layer w6: v1(83.58,-747.24) 83.58,-731.83 112.38,-703.02 157.21,-703.02 176.82,-722.63 204.28,-722.63 215.37,-711.55 236.07,-711.55 248.61,-724.09 248.61,-725.31 v1(256.65,-733.35) ; v1(275,-385) 275.49,-385 281.04,-379.45 365.45,-379.45 416.66,-328.24 416.66,-282.37 433.69,-265.34 434.66,-265.34 D2.2
  Bottom Layer w6: R3.2 78.89,-782.13 84.38,-776.87 87.89,-773.35 91,-770.02 91,-755.58 87.89,-751.06 84.08,-747.24 v1(83.58,-747.24) ; v1(256.65,-733.35) 256.65,-717.84 269.74,-704.75 269.74,-668.87 251.07,-650.2 251.07,-600.45 243.62,-593 243.62,-526.76 243.6,-416.4 v1(275,-385)
NetD3_1: D3.1 R6.2 | length 525
  Top Layer w6: D3.1 235,-377.68 235,-406.88 243.02,-414.89 243.02,-535.82 283.62,-576.43 283.62,-601.76 296.47,-614.61 v1(332.88,-614.61) ; v1(414,-606.37) 413.13,-607.25 413.13,-652.85 R6.2
  Bottom Layer w6: v1(332.88,-614.61) 355.13,-614.61 372.74,-597 404.65,-597 v1@414,-606.35
NetD5_1: D5.1 R7.1 | length 423.5
  Top Layer w6: v1(350.14,-533) 359.96,-542.82 359.96,-544.4 361.18,-545.62 361.18,-545.69 367,-551.51 367,-591.89 372.09,-596.98 372.09,-625.67 v1(364.6,-633.17) ; v1(355,-359.45) 355,-331.34 D5.1 ; R7.1 379.65,-681.73 392.44,-694.53 v1(392.44,-694.72)
  Bottom Layer w6: v1(350.14,-533) 350.14,-480.14 v1(350,-480) 350,-364.94 355,-359.94 v1(355,-359.45) ; v1(364.6,-633.17) 364.6,-650.21 392.44,-678.06 v1(392.44,-694.72)
NetIC1_15: IC1.15 J1.3 | length 659
  Top Layer w6: v1(331.72,-1164.65) 306.57,-1189.81 288.37,-1189.81 282.37,-1183.81 270.08,-1183.81 260,-1173.73 260,-1166.72 248.28,-1155 231.72,-1155 220,-1166.72 220,-1184.64 257.17,-1221.81 311.45,-1221.81 332.76,-1243.11 J1.3
  Bottom Layer w6: IC1.15 171.26,-938.19 207.98,-938.19 270.49,-1000.69 270.49,-1008.7 331.72,-1069.93 v1(331.72,-1164.65)
NetIC1_16: IC1.16 J1.2 | length 554.6
  Top Layer w6: v1(142.08,-1182.08) 165.06,-1182.08 167.98,-1185 183.49,-1185 236.89,-1238.41 279.59,-1238.41 305.29,-1264.11 305.29,-1282.81 J1.2
  Bottom Layer w6: v1(142.08,-1182.08) 142.08,-1129.75 145,-1126.83 145,-1075 101.82,-1031.82 101.82,-948.52 105.68,-944.66 105.68,-944.32 139.26,-910.75 IC1.16
NetIC1_22: IC1.22 R3.1 | length 175.5
  Bottom Layer w6: R3.1 75,-763.4 59,-779.4 59,-795.83 66.96,-803.8 83.04,-803.8 89.93,-796.9 89.93,-795.49 90.31,-795.11 90.31,-794.69 101.68,-783.32 115.38,-783.32 127.08,-771.62 127.08,-769.6 139.47,-757.2 IC1.22
NetIC1_23: IC1.23 R2.1 | length 681
  Top Layer w6: R2.1 484.65,-678.19 493.08,-669.76 493.29,-669.76 497.54,-665.52 497.54,-617.78 514.38,-600.94 v1(514.38,-556.62)
  Bottom Layer w6: IC1.23 199.56,-731.61 222.67,-754.72 236.63,-754.72 241.83,-759.92 258.37,-759.92 277,-741.28 277,-720.12 285.74,-711.38 285.74,-662.24 267.07,-643.57 267.07,-610.3 328.37,-549 506.76,-549 v1(514.38,-556.62)
NetIC2_7: IC2.7 Y1.1 | length 542.7
  Top Layer w6: v1(460.99,-987.09) 461.48,-987.09 471.66,-997.28 490.26,-997.28 IC2.7
  Top Layer w8: Y1.1 131.96,-738.24 164.57,-738.24 196.33,-770 v1(209.26,-770)
  Bottom Layer w6: v1(209.26,-770) 212.12,-770 285,-842.88 285,-933.28 296.72,-945 357.22,-945 357.56,-944.65 403.36,-944.65 445.8,-987.09 v1(460.99,-987.09)
NetIC2_8: IC2.8 Y1.3 | length 649
  Top Layer w6: v1(96.76,-880.22) 96.76,-891.47 93,-895.22 93,-899.86 91,-901.86 91,-919.31 121.82,-950.13 v1(121.82,-956.47) ; Y1.3 119.43,-835.02 v1(124.13,-839.72) ; v1(201.51,-960) v1(230.75,-930.75) ; v1(403.63,-1014) 450.54,-967.09 475.14,-967.09 485.28,-977.23 514.76,-977.23 IC2.8
  Bottom Layer w6: v1(96.76,-880.22) 124.13,-852.85 v1(124.13,-839.72) ; v1(121.82,-956.47) 144.19,-956.47 147.73,-960 v1(201.51,-960) ; v1(230.75,-930.75) 271.12,-971.12 271.12,-973.05 311.15,-1013.07 377.73,-1013.07 378.65,-1014 v1(403.63,-1014)
NetIC2_29: IC2.29 R1.2 S1.3 S1.4 | length 996.2
  Top Layer w6: IC2.29 344,-960.08 v1(344,-833.54) ; v1(263.62,-584.71) 263.62,-610.05 278.63,-625.06 278.63,-634.65 v1(278.98,-635) 298.31,-635 303.31,-640 v1(304.88,-640) ; v1(330,-480.65) 312.2,-462.86 S1.4 S1.3 ; v1(332.18,-660.76) 332.67,-660.76 335.52,-657.92 341.61,-657.92 343.5,-656.03 R1.2
  Bottom Layer w6: v1(263.62,-584.71) 263.62,-547.03 v1(330,-480.65) ; v1(304.88,-640) 324.53,-659.65 331.07,-659.65 v1(332.18,-660.76) 331.83,-661.11 331.83,-673.3 325.07,-680.07 325.07,-690.07 329.95,-694.95 329.95,-712.42 309,-733.37 309,-746.63 321.82,-759.45 331.18,-759.45 344,-772.27 v1(344,-833.54)
NetS1_1: S1.1 S1.2 | length 192.2
  Top Layer w6: S1.2 319.05,-567.06 332.4,-567.06 334.46,-565 v1(335,-565) ; v1(465,-585) 465.54,-585 469.8,-580.74 480.95,-580.74 S1.1
  Bottom Layer w6: v1(335,-565) 445,-565 v1(465,-585)
RESET: C1.1 J2.5 J3.3 J4.3 | length 2465.9
  Top Layer w6: J4.3 4.65,-1195.35 44.06,-1195.35 v1(44.4,-1195) ; J2.5 348.64,131.36 348.64,95 395,48.64 395,-41.84 405.95,-52.79 405.95,-119.12 470.27,-183.43 543.43,-183.43 554,-194 v1(554,-199.6) ; C1.1 565,-1085.49 ; v1(570,-1080) 570,-1080.49 565,-1085.49 ; v1(585.78,-917.62) 585.78,-922.39 562,-946.18 562,-975.22 576.04,-989.26 576.04,-1031.85 565,-1042.89 565,-1085.49 ; v1(608.28,-1146.72) 610.51,-1146.72 620,-1156.21 620,-1161.47 645,-1186.47 J3.3
  Bottom Layer w6: v1(44.4,-1195) 79.4,-1230 150.73,-1230 168.93,-1211.8 293.26,-1211.8 327.42,-1245.96 599.04,-1245.96 J3.3 ; v1(554,-199.6) 564.12,-209.72 564.12,-210.7 568,-214.58 568,-232 600,-264 600,-635.82 621.18,-657 662.81,-657 688,-682.19 688,-717.81 661.28,-744.54 621.72,-744.54 584.13,-782.13 559.87,-782.13 550.12,-791.89 550.12,-832.49 561.1,-843.47 561.1,-880.85 586,-905.75 586,-917.62 v1(585.78,-917.62) ; v1(570,-1080) 569.65,-1080.35 569.65,-1094.49 565,-1099.14 565,-1109.14 602.58,-1146.72 v1(608.28,-1146.72)
RX: IC1.1 R4.1 | length 307
  Top Layer w6: v1(566.5,-798.13) 566.12,-797.75 566.12,-787.04 565.74,-786.65 565.74,-781.68 570,-777.42 570,-768.93 586.83,-752.11 v1(586.83,-722.89)
  Bottom Layer w6: IC1.1 501.1,-603.66 539.89,-642.45 561.67,-642.45 562.67,-643.45 582.49,-643.45 586.83,-647.79 v1(586.83,-722.89) ; v1(566.5,-798.13) 566.88,-798.52 566.88,-807.47 R4.1
TX: IC1.5 R5.1 | length 73.3
  Top Layer w6: R5.1 449.65,-681.73 468.09,-700.18 v1(490.83,-700.18)
  Bottom Layer w6: IC1.5 476.43,-700.18 v1(490.83,-700.18)
VIN: J4.1 U1.1 | length 317.9
  Bottom Layer w6: J4.1 65,-1335 149.14,-1335 179.24,-1304.9 179.24,-1248.23 191.96,-1235.51 U1.1
VUSB: D4.A J1.1 | length 314.4
  Top Layer w6: D4.A@90,-1414.37 151.64,-1414.37 173.76,-1436.5 216.39,-1436.5 240.11,-1412.77 240.11,-1344.85 281.57,-1303.39 J1.1
pads on no net: IC1.3 IC1.6 IC1.8 IC1.9 IC1.10 IC1.11 IC1.12 IC1.13 IC1.14 IC1.19 IC1.24 IC1.26 IC1.27 IC1.28 J1.4 Y1.4

## Silkscreen, mask and mechanical layers (free items; w line width, h text height)
Mechanical 1:
  the board outline again, w6